# EAGLE board arquivo tinkercad (EAGLE 9.7.0)

Size 150.52 x 173.01 mm. Coordinates in mm from the lower left corner, seen from the top.
Outline: 0,0 150.52,0 150.52,173.01 0,173.01 0,0
Copper layers (1*16): Top 0.035mm / dielectric 1.5mm / Bottom 0.035mm
Design rules "default": minimum track width 6mil, minimum drill 0.35mm, track to track 6mil, track to pad 6mil, pad to pad 6mil, via to via 6mil, smd to smd 6mil, copper to edge 40mil, drill to drill 6mil, minimum pad ring 10mil, minimum via ring 8mil, stop-mask expansion 4mil, vias tented up to drill 0mil, thermal gap 10mil

## Footprints (pad centres in the part's own frame; a part is rotated, then mirrored left to right if it is on the bottom)
BATTERY-GENERIC = drill 1.118 pad 3.15 octagon: + 2.54,0; - -2.54,0
MOTOR = drill 1.118 pad 3.15 octagon: + 2.54,0; - -2.54,0
GL5528 = drill 0.8 pad 1.4: 1 -1.702,0; 2 1.702,0
RESAD1016W63L850D250B = drill 0.83 pad 1.43: 1 -5.08,0; 2 5.08,0
HA-06-SM065 = drill 1 pad 1.676: 1 -2.54,-2.54; 2 0,2.54; 3 2.54,-2.54
SWITCH-MOMENTARY-PTH-6.5MM = drill 1.016 pad 1.88: 1 -3.251,2.261; 2 3.251,2.261; 3 -3.251,-2.261; 4 3.251,-2.261
TO92 = drill 0.813 octagon: 1 -1.27,0; 2 0,1.905; 3 1.27,0
ARDUINO-UNO-R3-SHIELD = drill 1.016 pad 1.88: 3.3V 24.13,-2.54; 5V 24.13,0; A0 24.13,12.7; A1 24.13,15.24; A2 24.13,17.78; A3 24.13,20.32; A4 24.13,22.86; A5 24.13,25.4; AREF -24.13,-13.97; D2 -24.13,20.32; D3 -24.13,17.78; D4 -24.13,15.24; D5 -24.13,12.7; D6 -24.13,10.16; D7 -24.13,7.62; D8 -24.13,3.81; D9 -24.13,1.27; D10 -24.13,-1.27; D11 -24.13,-3.81; D12 -24.13,-6.35; D13 -24.13,-8.89; GND@0 24.13,2.54; GND@1 24.13,5.08; GND@2 -24.13,-11.43; IOREF 24.13,-7.62; NC 24.13,-10.16; RES 24.13,-5.08; RX -24.13,25.4; SCL -24.13,-19.05; SDA -24.13,-16.51; TX -24.13,22.86; VIN 24.13,7.62
JHD-162A = drill 1.016 long: 1 -19.05,0; 2 -16.51,0; 3 -13.97,0; 4 -11.43,0; 5 -8.89,0; 6 -6.35,0; 7 -3.81,0; 8 -1.27,0; 9 1.27,0; 10 3.81,0; 11 6.35,0; 12 8.89,0; 13 11.43,0; 14 13.97,0; 15 16.51,0; 16 19.05,0

## Placement (x,y rotation side)
BAT1  9V  [BATTERY-GENERIC]  142.26,51.84 270 top
MMOTOR  MOTOR_HDR  [MOTOR]  100.85,63.8 0 top
R1  PHOTOCELL_GL5528  [GL5528]  5.71,92.52 0 top
RLCD  330  [RESAD1016W63L850D250B]  65.29,89.2 90 top
RLDR  10k  [RESAD1016W63L850D250B]  32.27,73.96 90 top
RLIGADESLIGA  10k  [RESAD1016W63L850D250B]  72.91,91.74 90 top
RMODO  10k  [RESAD1016W63L850D250B]  50.05,91.74 90 top
RPOT5  250k  [HA-06-SM065]  83.07,63.8 0 top
SLIGADESLIGA  SWITCH_MOMENTARY  [SWITCH-MOMENTARY-PTH-6.5MM]  70.37,62.53 90 top
SMODO  SWITCH_MOMENTARY  [SWITCH-MOMENTARY-PTH-6.5MM]  47.51,62.53 90 top
T1  NPN  [TO92]  123.27,86.98 0 top
UARDUINO  ARDUINO-UNO-R3-SHIELD  [ARDUINO-UNO-R3-SHIELD]  53.73,143.16 270 top
UTELA  LCD-16X2JHD-162A  [JHD-162A]  56.64,36.63 0 top

## Library data of the parts
BAT1 MMOTOR R1 RLCD RLDR RLIGADESLIGA RMODO RPOT5 SLIGADESLIGA SMODO UARDUINO UTELA = Tinkercad
T1 = Tinkercad; CATEGORY: Transistor; SUB-CATEGORY: BJT; TYPE: NPN

## Nets
BAT1+: BAT1.+ T1.1
BAT1-: BAT1.- MMOTOR.- RLDR.1 RLIGADESLIGA.2 RMODO.2 RPOT5.3 UARDUINO.GND@0 UARDUINO.GND@1 UARDUINO.GND@2 UTELA.1 UTELA.5 UTELA.16
MMOTOR_+: MMOTOR.+ T1.3
UARDUINO_5V: R1.2 RLCD.2 RPOT5.1 SLIGADESLIGA.1 SLIGADESLIGA.2 SMODO.1 SMODO.2 UARDUINO.5V UTELA.2
UARDUINO_A0: R1.1 RLDR.2 UARDUINO.A0
UARDUINO_D3: T1.2 UARDUINO.D3
UARDUINO_D4: RMODO.1 SMODO.3 SMODO.4 UARDUINO.D4
UARDUINO_D5: RLIGADESLIGA.1 SLIGADESLIGA.3 SLIGADESLIGA.4 UARDUINO.D5
UARDUINO_D6: UARDUINO.D6 UTELA.4
UARDUINO_D7: UARDUINO.D7 UTELA.6
UARDUINO_D8: UARDUINO.D8 UTELA.11
UARDUINO_D9: UARDUINO.D9 UTELA.12
UARDUINO_D10: UARDUINO.D10 UTELA.13
UARDUINO_D11: UARDUINO.D11 UTELA.14
UTELA_LED+: RLCD.1 UTELA.15
UTELA_VO: RPOT5.2 UTELA.3

## Tracks (layer width: path | path; a pad name or v marks a point on that pad's centre or on a via)
BAT1+  (1 unrouted)
BAT1-  (11 unrouted)
MMOTOR_+  (1 unrouted)
UARDUINO_5V  (8 unrouted)
UARDUINO_A0  (2 unrouted)
UARDUINO_D3  (1 unrouted)
UARDUINO_D4  (3 unrouted)
UARDUINO_D5  (3 unrouted)
UARDUINO_D6  (1 unrouted)
UARDUINO_D7  (1 unrouted)
UARDUINO_D8  (1 unrouted)
UARDUINO_D9  (1 unrouted)
UARDUINO_D10  (1 unrouted)
UARDUINO_D11  (1 unrouted)
UTELA_LED+  (1 unrouted)
UTELA_VO  (1 unrouted)